# Altium PCB toorumquest2.PcbDoc
Units mm, origin at the board's own origin, x right, y up, seen from the top; angles counter-clockwise.
Board outline 130 x 80 mm, 2 copper layers (Top Layer, Bottom Layer); 39 components, 32 nets, 117 pads, 24 vias.
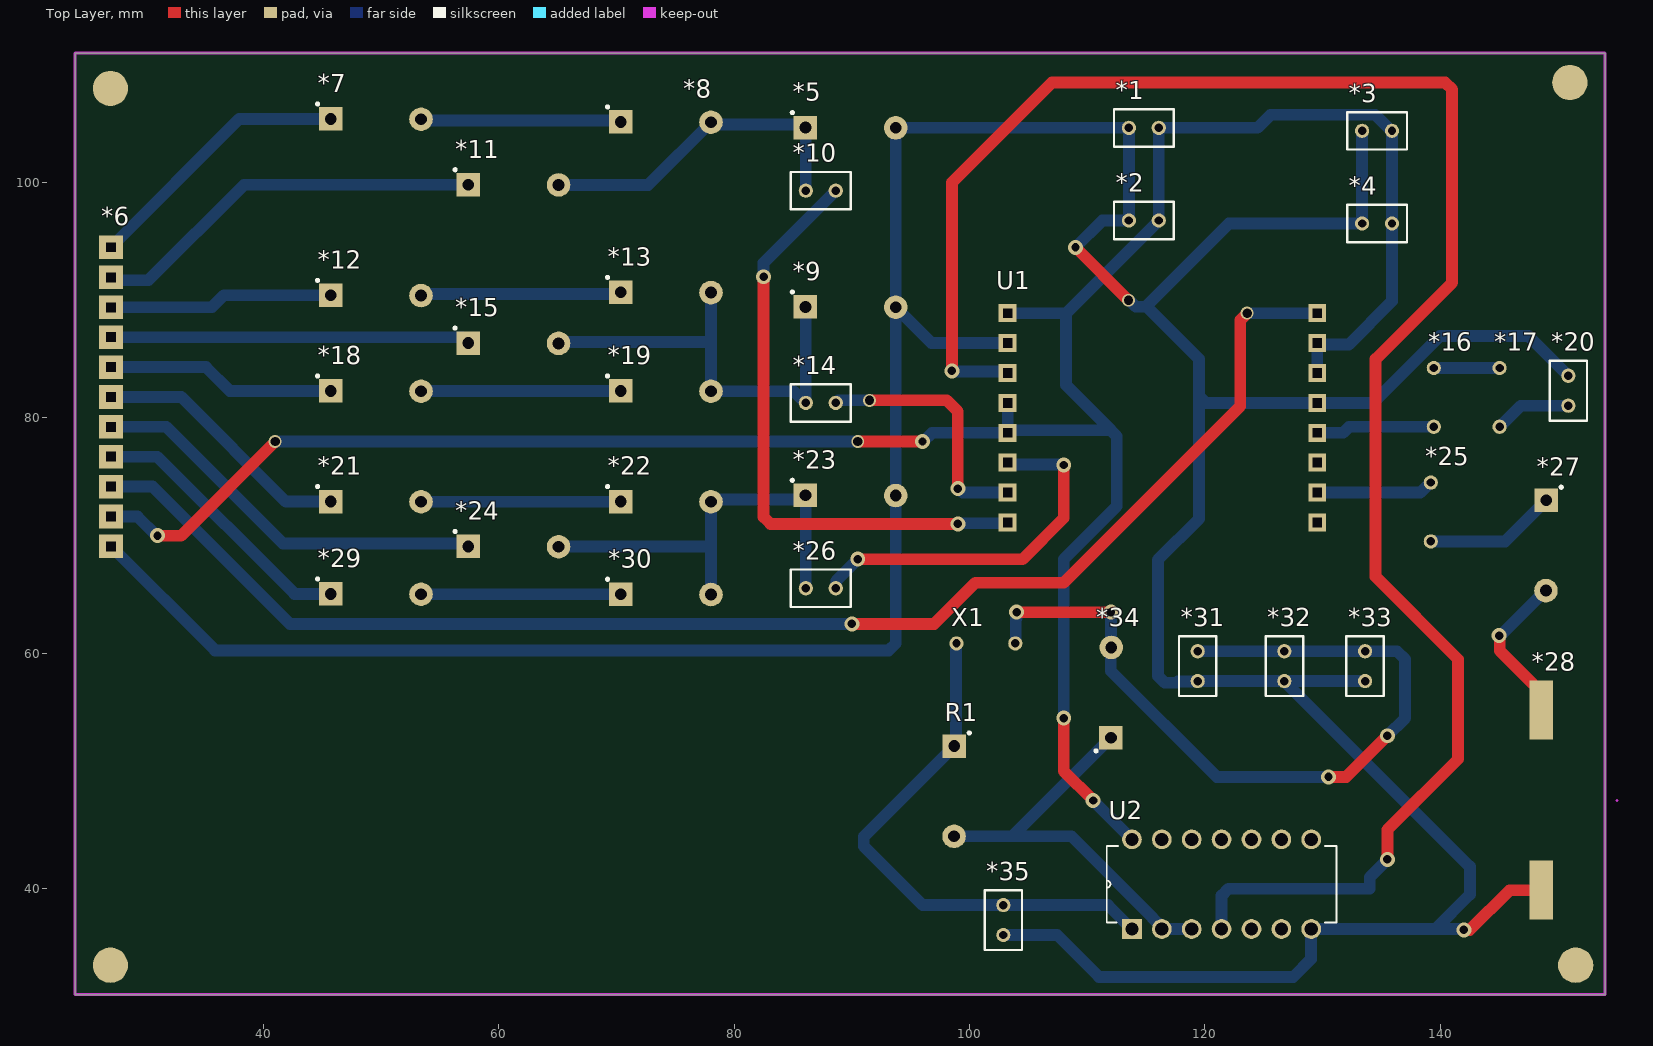
[diagram p0: Top Layer view]
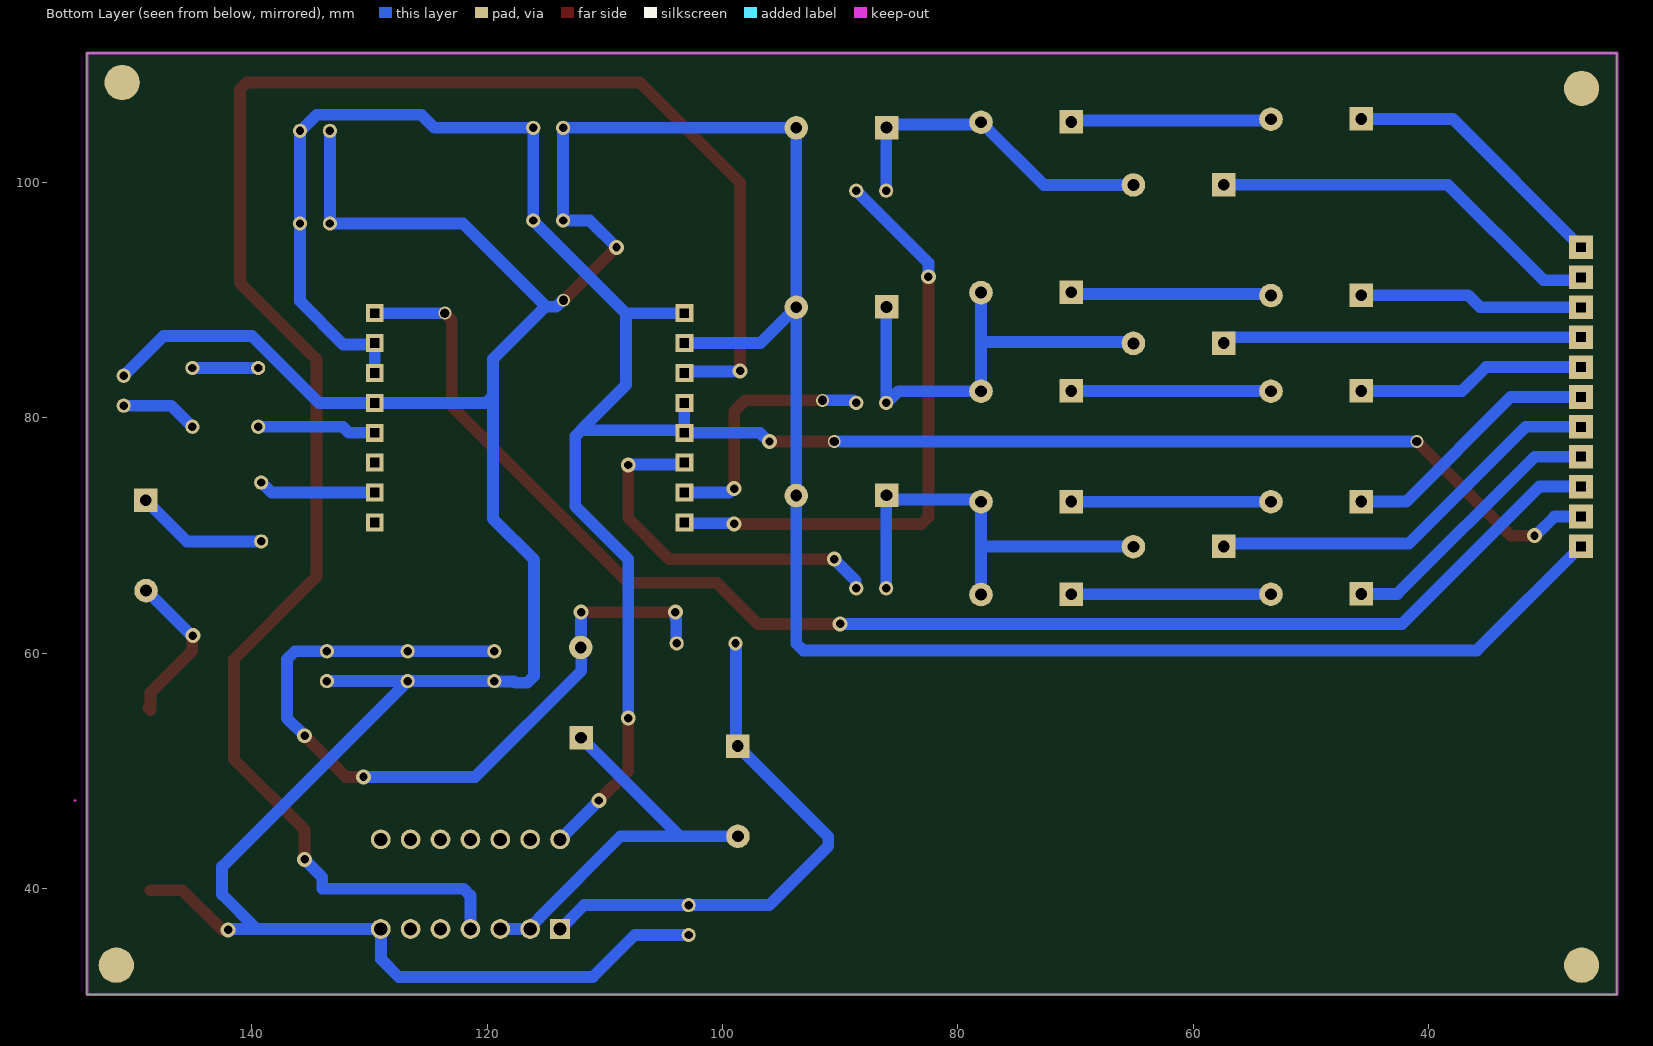
[diagram p1: Bottom Layer view, seen from below]

## Layer stack, top to bottom
Top Solder: solder mask 0.0102, Solder Resist, Dk 3.5
Top Layer: signal copper 0.0356
Dielectric 1: dielectric 0.32, FR-4, Dk 4.8
Bottom Layer: signal copper 0.0356
Bottom Solder: solder mask 0.0102, Solder Resist, Dk 3.5

## Board outline
24,31 154,31 154,47.5 154,92.5 154,111 24,111

## Design rules (kind name [scope] priority, off if disabled: settings)
Clearance Clearance_1 [All] p1: gap=0.254 ignorepadtopadclearanceinfootprint=FALSE except(0: Arc-Hole Track-Hole SMDPad-Hole THPad-Hole Via-Hole Fill-Hole Poly-Hole Region-Hole Text-Hole)
Clearance [All] p2: gap=0.254 ignorepadtopadclearanceinfootprint=FALSE except(0: Arc-Hole Track-Hole SMDPad-Hole THPad-Hole Via-Hole Fill-Hole Poly-Hole Region-Hole Text-Hole)
PolygonConnect [All] p1: connectstyle=Relief reliefconductorwidth=0.254 reliefentries=4 polygonreliefangle="90 Angle" airgapwidth=0.254
RoutingVias [All] p1: holewidth=0.711 width=1.27 viastyle="Through Hole" minholewidth=0.711 minwidth=1.27 maxholewidth=0.711 maxwidth=1.27
SolderMaskExpansion [All] p1: expansion=0.102 istentingtop=FALSE
Width [All] p1: maxlimit=2 minlimit=0.254 preferedwidth=0.254 minimp=50.000000 maximp=50.000000 favimp=50.000000
30 further rules are at their usual default settings.

## Components (designator, comment, footprint, x,y, rotation, side; value= is the part's Value field where it differs from the comment)
*1 "2.54 1uf" "2.54MM 1UF" 121.808,111.648 r0 top
*2 "2.54 1uf" "2.54MM 1UF" 121.808,103.774 r0 top
*3 "2.54 1uf" "2.54MM 1UF" 141.62,111.394 r0 top
*4 "2.54 1uf" "2.54MM 1UF" 141.62,103.52 r0 top
*5 "100 resistor" "100 RESISTOR" 86.03,104.673 r0 top
*6 "11pinheader" 11XPINHEADER 27.051,94.558 r270 top
*7 "100 resistor" "100 RESISTOR" 45.695,105.41 r0 top
*8 "100 resistor" "100 RESISTOR" 70.333,105.156 r0 top
*9 "100 resistor" "100 RESISTOR" 86.03,89.433 r0 top
*10 "2.54 1uf" "2.54MM 1UF" 94.359,106.314 r0 top
*11 "100 resistor" "100 RESISTOR" 57.379,99.822 r0 top
*12 "100 resistor" "100 RESISTOR" 45.695,90.424 r0 top
*13 "100 resistor" "100 RESISTOR" 70.333,90.678 r0 top
*14 "2.54 1uf" "2.54MM 1UF" 94.359,88.28 r0 top
*15 "100 resistor" "100 RESISTOR" 57.379,86.36 r0 top
*16 "5mm 220uf" "5MM 220UF" 139.446,79.248 r90 top
*17 "5mm 220uf" "5MM 220UF" 145.034,84.248 r270 top
*18 "100 resistor" "100 RESISTOR" 45.695,82.296 r0 top
*19 "100 resistor" "100 RESISTOR" 70.333,82.296 r0 top
*20 "2.54 1uf" "2.54MM 1UF" 143.876,89.315 r90 top
*21 "100 resistor" "100 RESISTOR" 45.695,72.898 r0 top
*22 "100 resistor" "100 RESISTOR" 70.333,72.898 r0 top
*23 "100 resistor" "100 RESISTOR" 86.03,73.431 r0 top
*24 "100 resistor" "100 RESISTOR" 57.379,69.088 r0 top
*25 "5mm 220uf" "5MM 220UF" 139.192,74.511 r270 top
*26 "2.54 1uf" "2.54MM 1UF" 94.359,72.532 r0 top
*27 "100 resistor" "100 RESISTOR" 149,73.025 r270 top
*28 "RCA SURFACE" "RCA SURFACE" 148.59,55.178 r270 top
*29 "100 resistor" "100 RESISTOR" 45.695,65.049 r0 top
*30 "100 resistor" "100 RESISTOR" 70.333,65.024 r0 top
*31 "2.54 22uf" "2.54MM 1UF" 112.38,65.913 r90 top
*32 "2.54 22uf" "2.54MM 1UF" 119.746,65.913 r90 top
*33 "2.54 22uf" "2.54MM 1UF" 126.604,65.913 r90 top
*34 "200ohm" "100 RESISTOR" 112.014,52.807 r90 top
*35 "47pf" "2.54MM 1UF" 95.87,44.338 r90 top
R1 "1mohm" "100 RESISTOR" 98.704,52.146 r270 top
U1 "AD725" "AD725 SOIC16" 103.24,88.773 r0 top
U2 "74HC04N,652" DIP254P762X420-14 129.032,44.196 r90 top
X1 "5mm 220uf" "5MM 220UF" 98.886,60.846 r0 top

## Footprints (in the part's own frame and the unit in brackets; to place one, negate y for a bottom-side part, rotate by r counter-clockwise, add the part's x,y. Pads: shape width x height; smd on the part's side, far side on the other; paste and mask are expansions set on the pad)
"2.54MM 1UF" [mm]
  round 1.21 hole 0.71: 1(-8.27,-7) 2(-5.73,-7)
  silkscreen extent -9.54,-8.59 -4.46,-5.41
"5MM 220UF" [mm]
  round 1.21 hole 0.71: 1(0,0) 2(5,0)
11XPINHEADER [mm]
  rect 2x2 hole 0.8 square: 1(0.051,0) 2(2.616,0) 3(5.156,0) 4(7.696,0) 5(10.236,0) 6(12.776,0) 7(15.31,0) 8(17.85,0) 9(20.39,0) 10(22.93,0) 11(25.47,0)
"100 RESISTOR" [mm]
  rect 2x2 hole 1 mask+0.05: 1(0.025,0)
  round 2 hole 1 mask+0.05: 2(7.696,-0.025)
  silkscreen extent -1.18,1.18 -1,1.36, body extent -0.16,-1.08 7.94,0.92, height 2
"AD725 SOIC16" [mil] "SOIC, 16-Leads, Body 10,25x7,50mm, Pitch 1,27mm, IPC Medium Density"
  rect 60x60 hole 31.5 square: 1(0,5) 2(0,-95) 3(0,-195) 4(0,-295) 5(0,-395) 6(0,-495) 7(0,-595) 8(0,-695) 9(1035.43,-695) 10(1035.43,-595) 11(1035.43,-495) 12(1035.43,-395) 13(1035.43,-295) 14(1035.43,-195) 15(1035.43,-95) 16(1035.43,5)
  body extent -49,-745 1084,55, height 336
DIP254P762X420-14 [mil]
  rect 66x66 hole 44: 1(-300,600)
  round 66 hole 44: 2(-300,500) 3(-300,400) 4(-300,300) 5(-300,200) 6(-300,100) 7(-300,0) 8(0,0) 9(0,100) 10(0,200) 11(0,300) 12(0,400) 13(0,500) 14(0,600)
  silkscreen extent -278,-84 -22,684
"RCA SURFACE" [mm]
  rect 5x2 smd: 1(0,0) 2(15.3,0)

## Part data
*31 *32 *33 *35: library part "2.54 1uf"
*34 R1: library part "100 resistor"
U2: "Inverter IC 6 Channel 14-DIP", Package="DIP-14 Nexperia", Availability=Unavailable, MF="NXP USA", MP=74HC04N,652, Price=None, SnapEDA_Link=https://www.snapeda.com/parts/74HC04N,652/NXP%20USA%20Inc./view-part/643968/?ref=snap

## Free pads (board coordinates)
  round 3 all layers, no hole: 26(151,108.5) 27(151.5,33.5) 28(27,33.5) 29(27,108)

## Via types
v1: diameter 1.27, hole 0.711, Top Layer to Bottom Layer, 19 vias
v2: diameter 1.1, hole 0.8, Top Layer to Bottom Layer, 5 vias

## Nets (pads, with @x,y where several pads share a name; then routed paths per layer and width w, separated by ;. In a path a pad name is that pad's centre, name@x,y a point inside that pad or via, vN(x,y) a via of type N, cw(c..) or ccw(c..) an arc to the next point about the centre after c; other vN are vias at no path point)
+5: *1.2 *2.2 *3.2 *4.2 *6.10 U1.1 U1.4 U1.5 U1.14 U1.15 U2.14 | length 212.3
  Top Layer w1: v1(31,70) 33,70 v2(41,78) ; v2(90.5,78) v1(96,78) ; v1(108,54.5) 108,50 v1(110.5,47.5)
  Bottom Layer w1: *6.10 29.299,71.628 v1@30.927,70 ; v2(41,78) v2(90.5,78) ; v1(96,78) 96.073,78 96.813,78.74 U1.5 ; U1.4 U1.5 ; U1.1 108.204,88.9 ; v1(108,54.5) 108,68 112.5,72.5 112.5,78.448 111.948,79 ; v1(110.5,47.5) 110.5,47.494 113.792,44.202 U2.14 ; U1.14 U1.15 129.667,86.233 132.207,86.233 135.89,89.916 *4.2 *3.2 135.833,104.394 134.474,105.753 125.576,105.753 124.471,104.648 *1.2 *2.2 108.204,88.9 ; U1.5 103.448,78.948 111.948,78.948 111.948,79 ; 108.204,88.9 108.204,82.796 111.948,79.052 111.948,79
GND: *1.1 *2.1 *3.1 *4.1 *5.2 *6.11 *9.2 *20.2 *23.2 *28.2 *31.1 *32.1 *33.1 *35.1 U1.2 U1.13 U2.7 | length 364.2
  Top Layer w1: v1(109,94.5) v2(113.5,90) ; v1(142,36.5) 142.5,36.5 145.878,39.878 *28.2
  Bottom Layer w1: *6.11 35.889,60.25 93.14,60.25 93.726,60.836 *23.2 *9.2 ; *35.1 107.432,36.068 111,32.5 127.5,32.5 129,34 129,36.544 U2.7 139.576,36.576 ; U1.2 96.774,86.36 *9.2 ; v1(109,94.5) 111.274,96.774 *2.1 *1.1 *5.2 *9.2 ; v2@113.538,90.038 114.124,89.452 114.952,89.452 122.02,96.52 *4.1 *3.1 ; 115,89.5 119.5,85 119.5,81.866 ; *33.1 *32.1 ; v1(142,36.5) 141.924,36.576 139.576,36.576 ; *20.2 147.5,86.961 139.961,86.961 134.28,81.28 U1.13 120.086,81.28 119.5,81.866 ; 119.5,81.866 119.5,71.433 116,67.933 116,58.086 116.586,57.5 117.586,57.5 117.688,57.603 119.34,57.603 *31.1 *32.1 ; *32.1 142.511,41.878 142.511,39.511 139.576,36.576
Net*5_1: *5.1 *8.2 *10.1 *11.2 | length 28.8
  Bottom Layer w1: *11.2 72.695,99.797 *8.2 78.22,104.939 85.789,104.939 *5.1 86.072,104.656 86.072,99.331 *10.1
Net*6_1: *6.1 *7.1 | length 23.2
  Bottom Layer w1: *6.1 37.954,105.41 *7.1
Net*6_2: *6.2 *11.1 | length 33.8
  Bottom Layer w1: *6.2 27.299,91.694 30.226,91.694 38.354,99.822 *11.1
Net*6_3: *6.3 *12.1 | length 19.1
  Bottom Layer w1: *6.3 35.624,89.402 36.647,90.424 *12.1
Net*6_4: *6.4 *15.1 | length 29.9
  Bottom Layer w1: *6.4 *15.1@56.902,86.862
Net*6_5: *6.5 *18.1 | length 19.5
  Bottom Layer w1: *6.5 35.123,84.322 37.148,82.296 *18.1
Net*6_6: *6.6 *21.1 | length 22.3
  Bottom Layer w1: *6.6 33.026,81.782 41.91,72.898 *21.1
Net*6_7: *6.7 *24.1 | length 34.6
  Bottom Layer w1: *6.7 31.75,79.248 41.656,69.342 57.15,69.342 *24.1
Net*6_8: *6.8 *29.1 | length 23.5
  Bottom Layer w1: *6.8 30.988,76.708 42.647,65.049 *29.1
Net*6_9: *6.9 U1.16 | length 122.5
  Top Layer w1: v1(90,62.5) 97,62.5 100.5,66 108,66 123,81 123,88.314 v2(123.586,88.9)
  Bottom Layer w1: *6.9 30.582,74.168 42.25,62.5 v1(90,62.5) ; v2(123.586,88.9) U1.16
Net*7_2: *7.2 *8.1 | length 17.1
  Bottom Layer w1: *7.2 53.505,105.27 70.244,105.27 *8.1
Net*9_1: *9.1 *13.2 *14.1 *15.2 *19.2 | length 38
  Bottom Layer w1: *15.2 65.202,86.462 78.029,86.462 ; *13.2 78.029,86.462 ; *9.1 86.072,89.416 86.072,81.297 *14.1 86.032,81.28 85.042,82.271 *19.2 78.029,86.462
Net*10_2: *10.2 U1.8 | length 51.3
  Top Layer w1: v1(82.5,92) 82.5,71.586 83.086,71 v1(99,71)
  Bottom Layer w1: v1(82.5,92) 82.5,93.185 *10.2 ; v1(99,71) 99.052,71.052 103.172,71.052 U1.8
Net*12_2: *12.2 *13.1 | length 16.7
  Bottom Layer w1: *12.2@53.53,90.538 *13.1@70.218,90.538
Net*14_2: *14.2 U1.7 | length 21.8
  Top Layer w1: v2(91.5,81.5) 98.06,81.5 99,80.56 v1(99,74)
  Bottom Layer w1: *14.2 88.849,81.5 v2(91.5,81.5) ; v1(99,74) 99.073,74 99.413,73.66 U1.7
Net*16_1: *16.1 U1.12 | length 10.1
  Bottom Layer w1: U1.12 131.74,78.74 132.248,79.248 *16.1
Net*16_2: *16.2 *17.1 | length 5.6
  Bottom Layer w1: *16.2 *17.1
Net*17_2: *17.2 *20.1 | length 6.6
  Bottom Layer w1: *17.2 146.831,81.045 *20.1
Net*18_2: *18.2 *19.1 | length 16.9
  Bottom Layer w1: *18.2@53.404,82.283 *19.1@70.345,82.283
Net*21_2: *21.2 *22.1 | length 16.9
  Bottom Layer w1: *21.2@53.404,72.885 *22.1@70.345,72.885
Net*22_2: *22.2 *23.1 *24.2 *26.1 *30.2 | length 37
  Bottom Layer w1: *24.2 65.1,69.088 78.029,69.088 ; *30.2 78.029,69.088 ; *26.1 86.072,65.549 86.072,73.414 *23.1 85.688,73.064 78.22,73.064 *22.2 78.029,69.088
Net*25_1: *25.1 U1.10 | length 10
  Bottom Layer w1: U1.10 138.284,73.66 139.135,74.511 *25.1
Net*25_2: *25.2 *27.1 | length 11.3
  Bottom Layer w1: *25.2 145.511,69.511 *27.1
Net*26_2: *26.2 U1.6 | length 31.5
  Top Layer w1: v1(90.5,68) 104.5,68 108,71.5 v1(108,76)
  Bottom Layer w1: *26.2 88.669,65.572 88.669,66.169 v1(90.5,68) ; U1.6 103.388,76.052 107.948,76.052 v1(108,76)
Net*27_2: *27.2 *28.1 | length 13.6
  Top Layer w1: v1(145,61.5) 145.052,61.448 145.052,60.216 148.59,56.678 *28.1 *28.1@148.783,55.371
  Bottom Layer w1: v1(145,61.5) 145.073,61.5 148.902,65.329 *27.2
Net*29_2: *29.2 *30.1 | length 17
  Bottom Layer w1: *29.2 *30.1
Net*31_2: *31.2 *32.2 *33.2 *34.2 X1.2 | length 69.3
  Top Layer w1: v1(104,63.5) v1(112,63.5) ; v1(130.5,49.5) 132,49.5 v1(135.5,53)
  Bottom Layer w1: X1.2 103.926,60.886 v1@103.926,62.926 ; v1@104,63 v1(104,63.5) ; v1(112,63.5) 112.02,63.48 112.02,60.523 *34.2 112,60.463 112,58.5 121,49.5 v1(130.5,49.5) ; *31.2 *32.2 *33.2 136.317,60.183 137,59.5 137,54.5 v1(135.5,53)
Net*34_1: *34.1 R1.2 U2.2 U2.3 | length 35.4
  Bottom Layer w1: R1.2 103.632,44.45 ; *34.1 103.632,44.45 ; U2.3 U2.2 116.332,36.759 115.495,37.596 115.495,37.615 108.661,44.45 103.632,44.45
Net*35_2: *35.2 R1.1 U2.1 X1.1 | length 46.1
  Bottom Layer w1: X1.1@98.846,60.806 98.846,52.262 R1.1 91.016,44.432 91.016,43.604 96.012,38.608 *35.2 111.76,38.608 U2.1
NetU1_3: U1.3 U2.4 | length 159.4
  Top Layer w1: v1(98.5,84) 98.5,100 107,108.5 140.414,108.5 141,107.914 141,91.5 134.5,85 134.5,66.5 141.5,59.5 141.5,51.019 135.5,45.019 v1(135.5,42.5)
  Bottom Layer w1: v1(98.5,84) 98.552,83.948 103.112,83.948 U1.3 ; U2.4 121.412,39.414 121.998,40 134,40 134,40.981 135.5,42.481 v1(135.5,42.5)
pads on no net: U1.9 U1.11 U2.5 U2.6 U2.8 U2.9 U2.10 U2.11 U2.12 U2.13

## Keep-outs
Keep-Out Layer:
  lines w0.254: 24,31 24,111 154,111 154,92.5 154,47.5 154,31 24,31 ; 155,47.5 155,47.5

## Other copper
Multi-Layer:
  text "NTSC & PAL VİDEO SİNYAL ÜRETECİ" at 40.351,40.5 h6

## Silkscreen, mask and mechanical layers (free items; w line width, h text height)
Mechanical 1:
  lines w0.254: 24,31 154,31 154,111 24,111 24,31